# Altium PCB mag_pos_con_FX-30_THT.PcbDoc
Units mm, origin at the board's own origin, x right, y up, seen from the top; angles counter-clockwise.
Board outline 9.5 x 7 mm, 2 copper layers (Top Layer, Bottom Layer), stack 1.071 mm thick; 5 components, 4 nets, 12 pads, 0 vias.
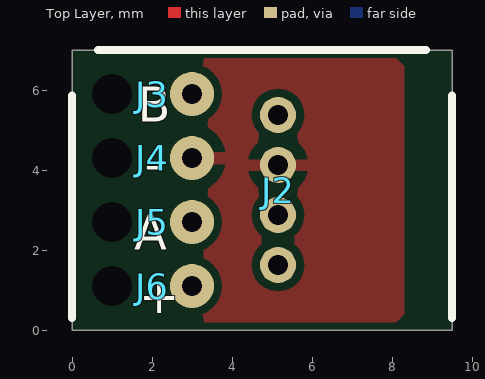
[diagram p0: Top Layer view]
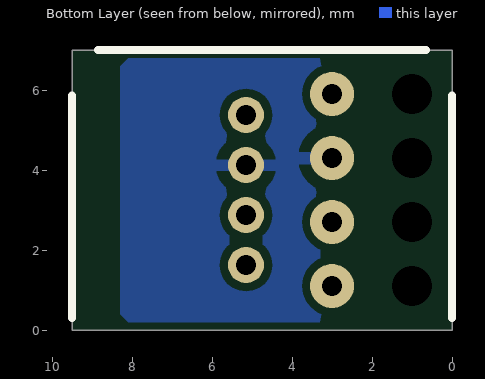
[diagram p1: Bottom Layer view, seen from below]

## Layer stack, top to bottom
Top Solder: solder mask 0.0102, Solder Resist, Dk 3.5
Top Layer: signal copper 0.0356
Dielectric 1: dielectric 1, FR-4, Dk 4.8
Bottom Layer: signal copper 0.0356
Bottom Solder: solder mask 0.0102, Solder Resist, Dk 3.5

## Board outline
0,0 9.5,0 9.5,7 0,7

## Design rules (kind name [scope] priority, off if disabled: settings)
Clearance [All] p1: gap=0.2 ignorepadtopadclearanceinfootprint=FALSE except(0: Arc-Hole Track-Hole SMDPad-Hole THPad-Hole Via-Hole Fill-Hole Poly-Hole Region-Hole Text-Hole)
ComponentClearance [All] p1: gap=0.2 collisioncheckmode=3 verticalgap=0.2 showdistances=FALSE
HoleSize [All] p1: absolutevalues=TRUE maxlimit=3.2 minlimit=0.3 maxpercent=80.000 minpercent=20.000
HoleToHoleClearance [All] p1: gap=0.3 allowstackedmicrovias=TRUE
MinimumAnnularRing [All] p1: minimumring=0.15
MinimumSolderMaskSliver [All] p1: minsoldermaskwidth=0.1
PolygonConnect [All] p1: thpad.connectstyle=Relief thpad.reliefconductorwidth=0.3 thpad.reliefentries=4 thpad.polygonreliefangle="90 Angle" thpad.airgapwidth=0.3 smdpad.connectstyle=Relief smdpad.reliefconductorwidth=0.25 smdpad.reliefentries=4 smdpad.polygonreliefangle="90 Angle" smdpad.airgapwidth=0.25 via.connectstyle=Direct via.reliefconductorwidth=0.254 via.reliefentries=4 via.polygonreliefangle="90 Angle" via.airgapwidth=0.254
RoutingVias [All] p1: holewidth=0.35 width=0.7 viastyle="Through Hole" minholewidth=0.3 minwidth=0.65 maxholewidth=0.5 maxwidth=3
SilkToSilkClearance [All] p1: silktosilkclearance=0.1
SilkToSolderMaskClearance [IsPad] p1: minsilkscreentomaskgap=0.15 clearancetoexposedcopper=TRUE
SolderMaskExpansion SolderMaskExpansion_Via [IsVia] p1: expansion=0.102 istentingtop=TRUE
SolderMaskExpansion [All] p2: expansion=0.05 istentingtop=FALSE
Width [All] p1: maxlimit=1 minlimit=0.2 preferedwidth=0.2 minimp=50.000000 maximp=50.000000 favimp=50.000000
24 further rules are at their usual default settings.

## Components (designator, comment, footprint, x,y, rotation, side; value= is the part's Value field where it differs from the comment)
J2 "CON_MOLEX_PICOBLADE_4_RA_THT" CON_MOLEX_PICOBLADE_4_RA_THT 7,3.5 r270 top
J3 "B" CON_1X1_WIRE_0.034MM2_RELIEF 3,5.9 r180 top
J4 "GND" CON_1X1_WIRE_0.034MM2_RELIEF 3,4.3 r180 top
J5 "A" CON_1X1_WIRE_0.034MM2_RELIEF 3,2.7 r180 top
J6 "VCC" CON_1X1_WIRE_0.034MM2_RELIEF 3,1.1 r180 top

## Footprints (in the part's own frame and the unit in brackets; to place one, negate y for a bottom-side part, rotate by r counter-clockwise, add the part's x,y. Pads: shape width x height; smd on the part's side, far side on the other; paste and mask are expansions set on the pad)
CON_1X1_WIRE_0.034MM2_RELIEF [mm] "Connection for a 0.034mm^2 wire with strain relief"
  round 1.1 hole 0.5: 1(0,0)
  round 0 hole 1 unplated: M(2,0)
CON_MOLEX_PICOBLADE_4_RA_THT [mm] "Molex Picoblade, 4 pins, Right Angle, THT, 530480450 or 530480410"
  round 0.9 hole 0.5: 1(1.875,-1.85) 2(0.625,-1.85) 3(-0.625,-1.85) 4(-1.875,-1.85)
  body extent -3.37,-2.9 3.37,2.6, height 3.5

## Part data
J2: "Molex Picoblade, 4 pins, Right Angle, THT, 532617004"
J3 J4 J5 J6: library part Wire_0.034MM2_RELIEF, "0.034mm^2 wire with strain relief", System=Connector

## Nets (pads, with @x,y where several pads share a name; then routed paths per layer and width w, separated by ;. In a path a pad name is that pad's centre, name@x,y a point inside that pad or via, vN(x,y) a via of type N, cw(c..) or ccw(c..) an arc to the next point about the centre after c; other vN are vias at no path point)
A: J2.2 J5.1
B: J2.4 J3.1
GND: J2.3 J4.1
VCC: J2.1 J6.1
pads on no net: J3.M J4.M J5.M J6.M

## Polygon pours and split planes (outlines as drawn)
GND on Bottom Layer "GND_L04_P003" (solid, remove dead copper, pour order 3): 1.9,0.4 2.1,0.2 8.1,0.2 8.3,0.4 8.3,6.6 8.1,6.8 2.1,6.8 1.9,6.6
GND on Top Layer "GND_L01_P000" (solid, remove dead copper, pour order 0): 1.9,0.4 2.1,0.2 8.1,0.2 8.3,0.4 8.3,6.6 8.1,6.8 2.1,6.8 1.9,6.6

## Silkscreen, mask and mechanical layers (free items; w line width, h text height)
Top Overlay:
  lines w0.2: 0,0.3 0,5.859 ; 0.646,7 8.855,7 ; 9.5,0.3 9.5,5.86
  text "B" at 1.637,4.92 h1.5
  text "-" at 1.818,3.453 h1.5
  text "A" at 1.551,1.72 h1.5
  text "+" at 1.684,0.128 h1.5
Bottom Overlay:
  lines w0.2: 0,0.3 0,5.859 ; 0.646,7 8.855,7 ; 9.5,0.3 9.5,5.86
Board:
  the board outline again, w0.2